# Altium PCB PCB1.PcbDoc
Units mil, origin at the board's own origin, x right, y up, seen from the top; angles counter-clockwise.
Board outline 6000 x 4000 mil, 2 copper layers (Top Layer, Bottom Layer); 6 components, 0 nets, 12 pads, 0 vias.
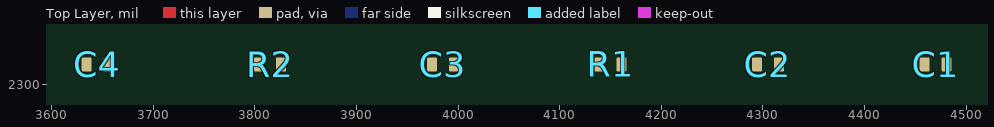
[diagram p0: Top Layer view]
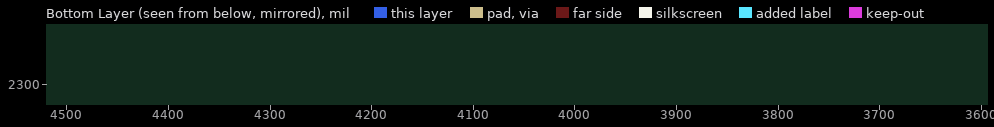
[diagram p1: Bottom Layer view, seen from below]

## Layer stack, top to bottom
Top Solder: solder mask 0.4, Solder Resist, Dk 3.5
Top Layer: signal copper 1.4
Dielectric 1: dielectric 12.6, FR-4, Dk 4.8
Bottom Layer: signal copper 1.4
Bottom Solder: solder mask 0.4, Solder Resist, Dk 3.5

## Board outline
1000,1000 7000,1000 7000,5000 1000,5000

## Design rules (kind name [scope] priority, off if disabled: settings)
Clearance [All] p1: gap=10 ignorepadtopadclearanceinfootprint=FALSE
PolygonConnect [All] p1: connectstyle=Relief reliefconductorwidth=10 reliefentries=4 polygonreliefangle="90 Angle" airgapwidth=10
RoutingVias [All] p1: holewidth=28 width=50 viastyle="Through Hole" minholewidth=28 minwidth=50 maxholewidth=28 maxwidth=50
SolderMaskExpansion [All] p1: expansion=4 istentingtop=FALSE
Width [All] p1: maxlimit=10 minlimit=10 preferedwidth=10
30 further rules are at their usual default settings.

## Components (designator, comment, footprint, x,y, rotation, side; value= is the part's Value field where it differs from the comment)
C1 "NM" CAP_0201 4470,2320 r0 top
C2 "NM" CAP_0201 4305,2320 r0 top
C3 "NM" CAP_0201 3985,2320 r0 top
C4 "NM" CAP_0201 3645,2320 r0 top
R1 "NM" RES_0201 4150,2320 r0 top
R2 "NM" RES_0201 3815,2320 r0 top

## Footprints (in the part's own frame and the unit in brackets; to place one, negate y for a bottom-side part, rotate by r counter-clockwise, add the part's x,y. Pads: shape width x height; smd on the part's side, far side on the other; paste and mask are expansions set on the pad)
CAP_0201 [mm]
  rrect25% 0.25x0.35 smd mask+0.05: 1(-0.275,0) 2(0.275,0)
  body extent -0.32,-0.17 0.32,0.16, height 0.34
RES_0201 [mm]
  rrect25% 0.25x0.35 smd mask+0.05: 1(-0.275,0) 2(0.275,0)
  body extent -0.3,-0.15 0.3,0.15, height 0.15

## Part data
C1 C2 C3 C4: library part CAP_0201_NM, "CAP, size 0201, NM, N/A", Capacitance=N/A, Operating Temperature Max="+ 85 C", Operating Temperature Min="- 40 C", Package / Case=0201, ComponentLink1Description=Datasheet, ComponentLink1URL=N/A, Mount=SMD/SMT, Packaging="Tape and Reel", Supplier=N/A, Supplier Part Number=N/A, Supplier URL=N/A, Tolerance=N/A, Voltage Rating DC=N/A
R1 R2: library part RES_0201_NM, "RES, size 0201, NM, N/A", LCSC Part #=N/A, Operating Temperature Max="+ 85 C", Operating Temperature Min="- 40 C", Package / Case=0201, ComponentLink1Description=Datasheet, ComponentLink1URL=N/A, Manufacturer=N/A, Manufacturer Part Number=N/A, Mount=SMD/SMT, Packaging="Tape and Reel", Rated Power=N/A, Resistance=NM, Supplier=N/A, Supplier backup=N/A, Supplier backup Part Number=N/A, Supplier backup URL=N/A, Supplier Part Number=N/A, Supplier URL=N/A, Tolerance=N/A

## Nets (pads, with @x,y where several pads share a name; then routed paths per layer and width w, separated by ;. In a path a pad name is that pad's centre, name@x,y a point inside that pad or via, vN(x,y) a via of type N, cw(c..) or ccw(c..) an arc to the next point about the centre after c; other vN are vias at no path point)
pads on no net: C1.1 C1.2 C2.1 C2.2 C3.1 C3.2 C4.1 C4.2 R1.1 R1.2 R2.1 R2.2